# EAGLE board Light Sensor - Teensy-DESKTOP-VOK6T8G (EAGLE 8.6.0)
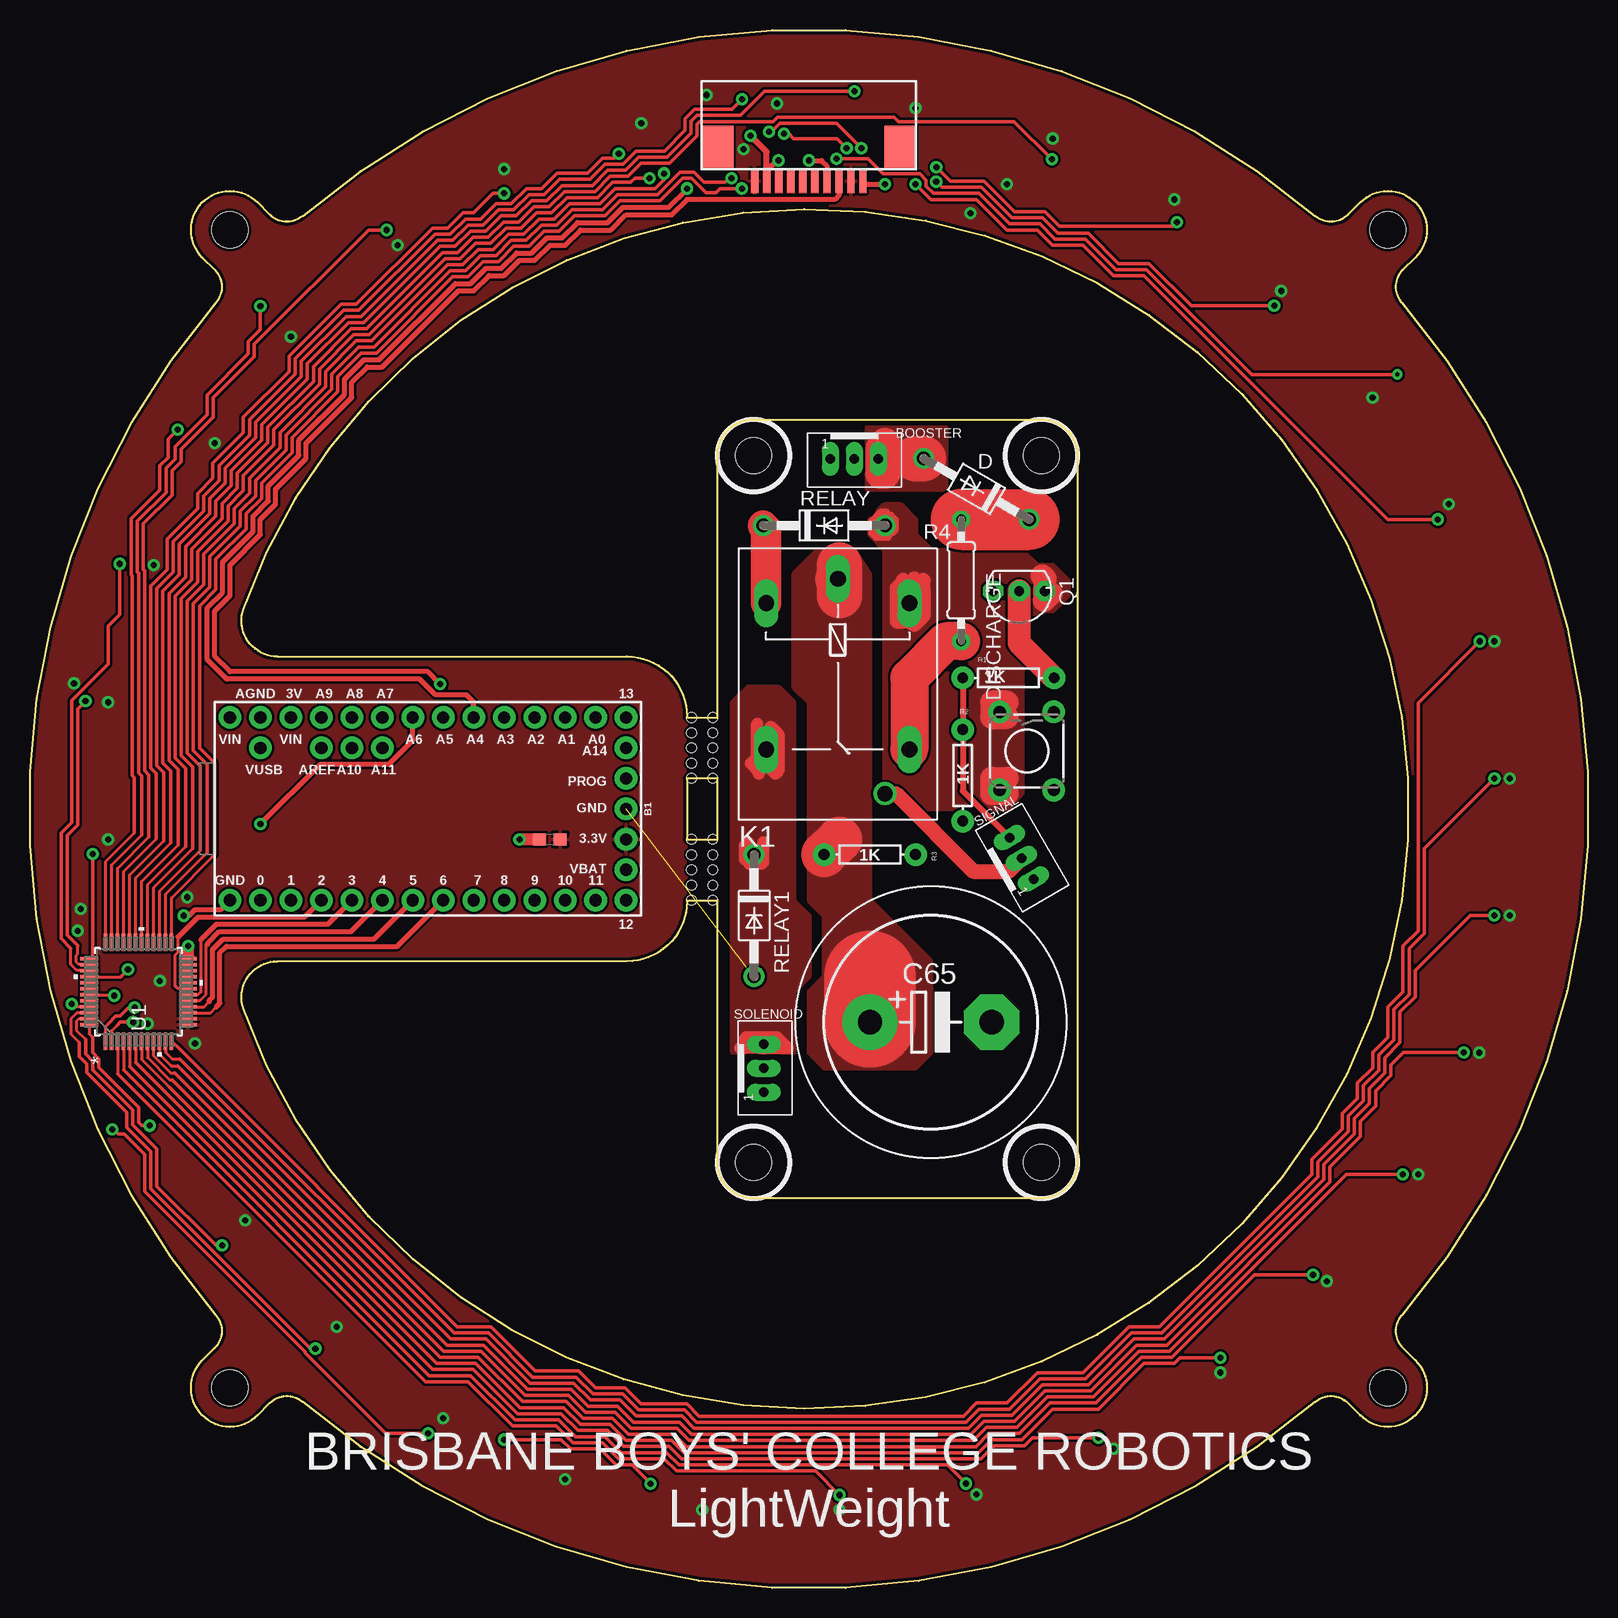
[diagram p0: board, top side]
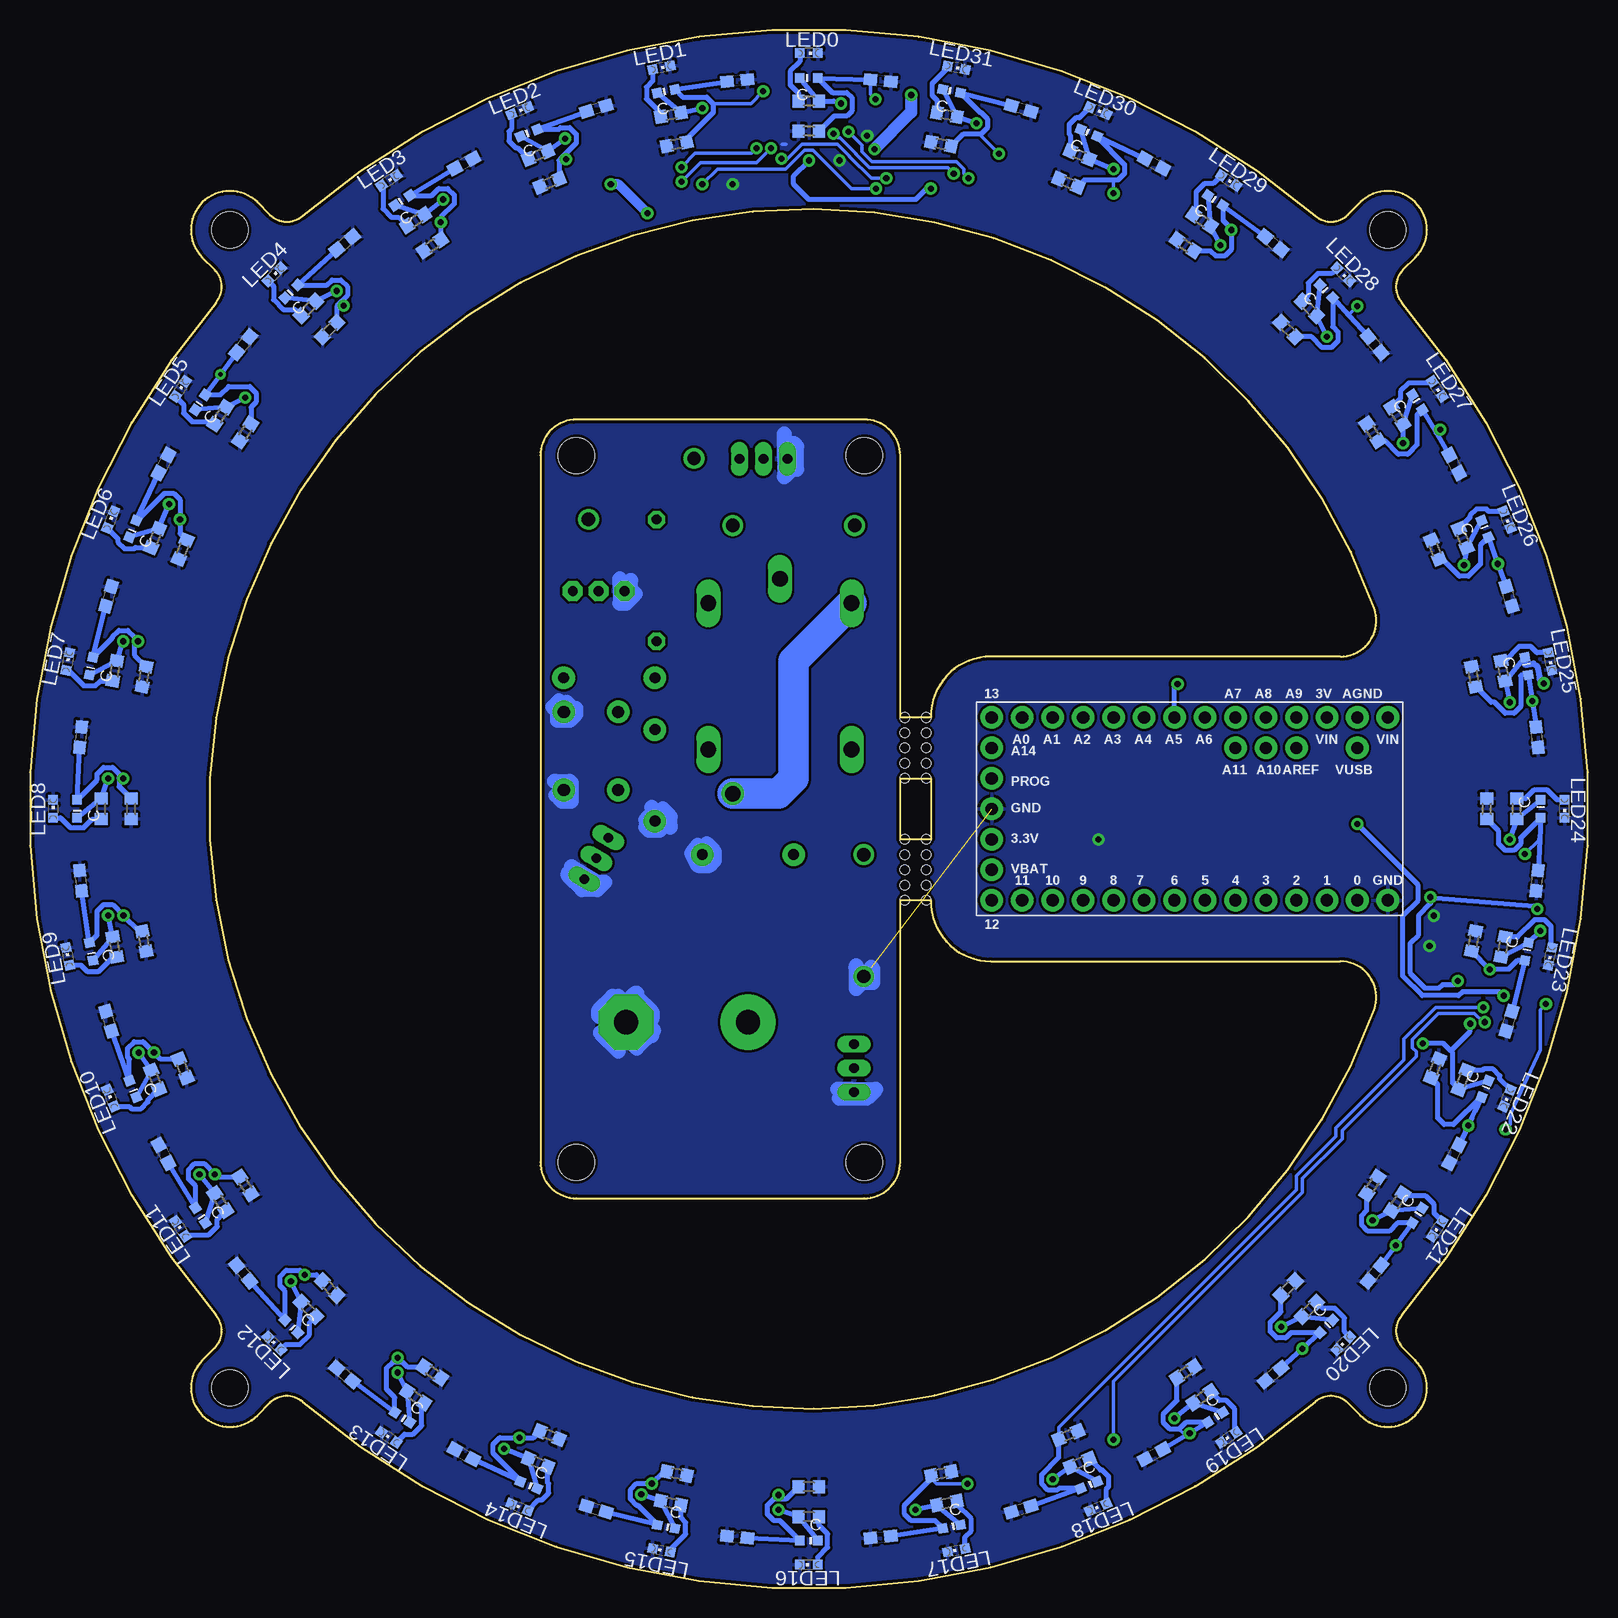
[diagram p1: board, bottom side, seen from below]

Size 129.86 x 129.86 mm. Coordinates in mm from the lower left corner, seen from the top.
Outline: 20.63,77.63 49.77,77.63 arc-90 54.77,72.63 54.77,72.55 57.31,72.55 57.31,94.39 arc-90 60.31,97.39 84.31,97.39 arc-90 87.31,94.39 87.31,35.47 arc-90 84.31,32.47 60.31,32.47 arc-90 57.31,35.47 57.31,57.31 54.77,57.31 54.77,57.23 arc-90 49.77,52.23 20.63,52.23 arc110 17.8,48.23 arc321 17.8,81.63 arc110 20.63,77.63
Outline: 57.31,67.47 54.77,67.47 54.77,62.39 57.31,62.39 57.31,67.47
Outline: 15.4,20 14.37,18.97 arc180 18.97,14.37 20,15.4 arc-86 22.71,15.51 arc81 107.15,15.51 arc-86 109.86,15.4 110.89,14.37 arc180 115.49,18.97 114.46,20 arc-86 114.35,22.71 arc81 114.35,107.15 arc-86 114.46,109.86 115.49,110.89 arc180 110.89,115.49 109.86,114.46 arc-86 107.15,114.35 arc81 22.71,114.35 arc-86 20,114.46 18.97,115.49 arc180 14.37,110.89 15.4,109.86 arc-86 15.51,107.15 arc81 15.51,22.71 arc-86 15.4,20
Copper layers (1*16): Top 0.035mm / dielectric 1.5mm / Bottom 0.035mm
Design rules "SparkFun": minimum track width 8mil, minimum drill 20mil, track to track 8mil, track to pad 8mil, pad to pad 8mil, via to via 8mil, smd to smd 8mil, copper to edge 10mil, drill to drill 8mil, minimum pad ring 12mil, minimum via ring 10mil, stop-mask expansion 4mil, vias tented up to drill 25mil, thermal gap 10mil
Holes 0.79 mm at 55.15,72.55 55.15,71.28 55.15,70.01 55.15,68.74 55.15,67.47 55.15,62.39 55.15,61.12 55.15,59.85 55.15,58.58 55.15,57.31 56.93,57.31 56.93,58.58 56.93,59.85 56.93,61.12 56.93,62.39 56.93,67.47 56.93,68.74 56.93,70.01 56.93,71.28 56.93,72.55
Holes 3 mm at 60.31,94.39 84.31,94.39 84.31,35.47 60.31,35.47 16.67,16.67 113.19,16.67 16.67,113.19 113.19,113.19

## Footprints (pad centres in the part's own frame; a part is rotated, then mirrored left to right if it is on the bottom)
TEENSY-3.1 = drill 1.016 pad 1.88: 0 7.62,-13.97; 1 7.62,-11.43; 2 7.62,-8.89; 3 7.62,-6.35; 3.3V 2.54,16.51; 3V -7.62,-11.43; 4 7.62,-3.81; 5 7.62,-1.27; 6 7.62,1.27; 7 7.62,3.81; 8 7.62,6.35; 9 7.62,8.89; 10 7.62,11.43; 11 7.62,13.97; 12 7.62,16.51; 13 -7.62,16.51; 14 -7.62,13.97; 15 -7.62,11.43; 16 -7.62,8.89; 17 -7.62,6.35; 18 -7.62,3.81; 19 -7.62,1.27; 20 -7.62,-1.27; 21 -7.62,-3.81; 22 -7.62,-6.35; 23 -7.62,-8.89; A10 -5.08,-6.35; A11 -5.08,-3.81; A14/DAC -5.08,16.51; AGND -7.62,-13.97; AREF -5.08,-8.89; GND 0,16.51; GND1 7.62,-16.51; PROG -2.54,16.51; VBAT 5.08,16.51; VIN -7.62,-16.51; VUSB -5.08,-13.97
JST_B3B-PH_HEADER = drill 0.8 long: P1 2.027,0.048; P2 0.028,0.048; P3 -1.972,0.048
C0603 = smd 1.1 x 1: 1 -0.85,0; 2 0.85,0
0603 = smd 1.1 x 1: 1 -0.85,0; 2 0.85,0
EB22,5D = drill 2.007 pad 4.597: + -5.08,0 | drill 2.007 pad 4.597 octagon: - 5.08,0
DO41-10 = drill 1.118: A 5.08,0; C -5.08,0
TACTILE-PTH = drill 1.016 pad 1.88: 1 -3.251,2.261; 2 3.251,2.261; 3 -3.251,-2.261; 4 3.251,-2.261
G5LE = drill 1.321 long: 1 -7.493,-5.969; 2 -7.493,5.969; O 4.699,5.969; P -9.525,0; S 4.699,-5.969
CHIPLED_0603 = smd 0.8 x 0.8: A 0,-0.75; C 0,0.75
SMD = smd 0.8 x 0.8: C -0.75,0; E 0.75,0
TO92-INLINE = drill 0.813 pad 1.676 octagon: 1 -2.159,0; 2 0,0; 3 2.159,0
AXIAL-0.3 = drill 0.9 pad 1.88: P$1 -3.81,0; P$2 3.81,0
0207/10 = drill 0.813 octagon: 1 -5.08,0; 2 5.08,0
R0603 = smd 1 x 1.1: 1 -0.85,0; 2 0.85,0
SU_48 = smd 1.473 x 0.279: 1 -4.115,2.75; 2 -4.115,2.25; 3 -4.115,1.75; 4 -4.115,1.25; 5 -4.115,0.75; 6 -4.115,0.25; 7 -4.115,-0.25; 8 -4.115,-0.75; 9 -4.115,-1.25; 10 -4.115,-1.75; 11 -4.115,-2.25; 12 -4.115,-2.75; 25 4.115,-2.75; 26 4.115,-2.25; 27 4.115,-1.75; 28 4.115,-1.25; 29 4.115,-0.75; 30 4.115,-0.25; 31 4.115,0.25; 32 4.115,0.75; 33 4.115,1.25; 34 4.115,1.75; 35 4.115,2.25; 36 4.115,2.75 | smd 0.279 x 1.473: 13 -2.75,-4.115; 14 -2.25,-4.115; 15 -1.75,-4.115; 16 -1.25,-4.115; 17 -0.75,-4.115; 18 -0.25,-4.115; 19 0.25,-4.115; 20 0.75,-4.115; 21 1.25,-4.115; 22 1.75,-4.115; 23 2.25,-4.115; 24 2.75,-4.115; 37 2.75,4.115; 38 2.25,4.115; 39 1.75,4.115; 40 1.25,4.115; 41 0.75,4.115; 42 0.25,4.115; 43 -0.25,4.115; 44 -0.75,4.115; 45 -1.25,4.115; 46 -1.75,4.115; 47 -2.25,4.115; 48 -2.75,4.115
FPC10 = smd 0.61 x 2.007: 1 -4.515,1.003; 2 -3.512,1.003; 3 -2.508,1.003; 4 -1.505,1.003; 5 -0.502,1.003; 6 0.502,1.003; 7 1.505,1.003; 8 2.508,1.003; 9 3.512,1.003; 10 4.515,1.003 | smd 2.667 x 3.607: N/C-1 -7.62,-1.803; N/C-2 7.62,-1.803

## Placement (x,y rotation side)
B1  TEENSY-3.1SILK  [TEENSY-3.1]  33.18,64.93 270 top
BOOSTER  JST-PH_3-PIN_HEADER  [JST_B3B-PH_HEADER]  68.74,94.14 180 top
C1  0.1uF  [C0603]  58.95,125.63 174.3 bottom
C2  0.1uF  [C0603]  70.91,125.63 185.6 bottom
C3  0.1uF  [C0603]  82.64,123.3 196.9 bottom
C4  0.1uF  [C0603]  93.68,118.73 208.1 bottom
C5  0.1uF  [C0603]  103.63,112.08 219.4 bottom
C6  0.1uF  [C0603]  112.08,103.63 230.6 bottom
C7  0.1uF  [C0603]  118.73,93.68 241.9 bottom
C8  0.1uF  [C0603]  123.3,82.64 253.1 bottom
C9  0.1uF  [C0603]  125.63,70.91 264.4 bottom
C10  0.1uF  [C0603]  125.63,58.95 275.6 bottom
C11  0.1uF  [C0603]  123.3,47.22 286.9 bottom
C12  0.1uF  [C0603]  118.73,36.17 298.1 bottom
C13  0.1uF  [C0603]  112.08,26.23 309.4 bottom
C14  0.1uF  [C0603]  103.63,17.77 320.6 bottom
C15  0.1uF  [C0603]  93.68,11.13 331.9 bottom
C16  0.1uF  [C0603]  82.64,6.55 343.1 bottom
C17  0.1uF  [C0603]  70.91,4.22 354.4 bottom
C18  0.1uF  [C0603]  58.95,4.22 5.6 bottom
C19  0.1uF  [C0603]  47.22,6.55 16.9 bottom
C20  0.1uF  [C0603]  36.17,11.13 28.1 bottom
C21  0.1uF  [C0603]  26.23,17.77 39.4 bottom
C22  0.1uF  [C0603]  17.77,26.23 50.6 bottom
C23  0.1uF  [C0603]  11.13,36.17 61.9 bottom
C24  0.1uF  [C0603]  6.55,47.22 73.1 bottom
C25  0.1uF  [C0603]  4.22,58.95 84.4 bottom
C26  0.1uF  [C0603]  4.22,70.91 95.6 bottom
C27  0.1uF  [C0603]  6.55,82.64 106.9 bottom
C28  0.1uF  [C0603]  11.13,93.68 118.1 bottom
C29  0.1uF  [C0603]  17.77,103.63 129.4 bottom
C30  0.1uF  [C0603]  26.23,112.08 140.6 bottom
C31  0.1uF  [C0603]  36.17,118.73 151.9 bottom
C32  0.1uF  [C0603]  47.22,123.3 163.1 bottom
C33  0.1uF  [0603]  43.34,62.39 0 top
C65  3300uF  [EB22,5D]  75.09,47.15 0 top
D  1N4004  [DO41-10]  78.9,91.6 150 top
DISCHARGE  [TACTILE-PTH]  83.09,69.75 270 top
K1  G5LE  [G5LE]  67.34,74.58 270 top
LED0  [CHIPLED_0603]  64.93,127.93 270 bottom
LED1  [CHIPLED_0603]  77.22,126.72 281.2 bottom
LED2  [CHIPLED_0603]  89.04,123.13 292.5 bottom
LED3  [CHIPLED_0603]  99.93,117.31 303.7 bottom
LED4  [CHIPLED_0603]  109.48,109.48 315 bottom
LED5  [CHIPLED_0603]  117.31,99.93 326.2 bottom
LED6  [CHIPLED_0603]  123.13,89.04 337.5 bottom
LED7  [CHIPLED_0603]  126.72,77.22 348.7 bottom
LED8  [CHIPLED_0603]  127.93,64.93 0 bottom
LED9  [CHIPLED_0603]  126.72,52.64 11.2 bottom
LED10  [CHIPLED_0603]  123.13,40.82 22.5 bottom
LED11  [CHIPLED_0603]  117.31,29.93 33.7 bottom
LED12  [CHIPLED_0603]  109.48,20.38 45 bottom
LED13  [CHIPLED_0603]  99.93,12.55 56.2 bottom
LED14  [CHIPLED_0603]  89.04,6.72 67.5 bottom
LED15  [CHIPLED_0603]  77.22,3.14 78.7 bottom
LED16  [CHIPLED_0603]  64.93,1.93 90 bottom
LED17  [CHIPLED_0603]  52.64,3.14 101.2 bottom
LED18  [CHIPLED_0603]  40.82,6.72 112.5 bottom
LED19  [CHIPLED_0603]  29.93,12.55 123.7 bottom
LED20  [CHIPLED_0603]  20.38,20.38 135 bottom
LED21  [CHIPLED_0603]  12.55,29.93 146.2 bottom
LED22  [CHIPLED_0603]  6.72,40.82 157.5 bottom
LED23  [CHIPLED_0603]  3.14,52.64 168.7 bottom
LED24  [CHIPLED_0603]  1.93,64.93 180 bottom
LED25  [CHIPLED_0603]  3.14,77.22 191.2 bottom
LED26  [CHIPLED_0603]  6.72,89.04 202.5 bottom
LED27  [CHIPLED_0603]  12.55,99.93 213.7 bottom
LED28  [CHIPLED_0603]  20.38,109.48 225 bottom
LED29  [CHIPLED_0603]  29.93,117.31 236.2 bottom
LED30  [CHIPLED_0603]  40.82,123.13 247.5 bottom
LED31  [CHIPLED_0603]  52.64,126.72 258.7 bottom
LS0  ALS  [SMD]  64.93,125.85 0 bottom
LS1  ALS  [SMD]  76.83,124.76 11.2 bottom
LS2  ALS  [SMD]  88.27,121.28 22.5 bottom
LS3  ALS  [SMD]  98.82,115.65 33.7 bottom
LS4  ALS  [SMD]  108.06,108.06 45 bottom
LS5  ALS  [SMD]  115.65,98.82 56.2 bottom
LS6  ALS  [SMD]  121.28,88.27 67.5 bottom
LS7  ALS  [SMD]  124.76,76.83 78.7 bottom
LS8  ALS  [SMD]  125.93,64.93 90 bottom
LS9  ALS  [SMD]  124.76,53.03 101.2 bottom
LS10  ALS  [SMD]  121.28,41.58 112.5 bottom
LS11  ALS  [SMD]  115.65,31.04 123.7 bottom
LS12  ALS  [SMD]  108.06,21.79 135 bottom
LS13  ALS  [SMD]  98.82,14.21 146.2 bottom
LS14  ALS  [SMD]  88.27,8.57 157.5 bottom
LS15  ALS  [SMD]  76.83,5.1 168.7 bottom
LS16  ALS  [SMD]  64.93,3.93 180 bottom
LS17  ALS  [SMD]  53.03,5.1 191.2 bottom
LS18  ALS  [SMD]  41.58,8.57 202.5 bottom
LS19  ALS  [SMD]  31.04,14.21 213.7 bottom
LS20  ALS  [SMD]  21.79,21.79 225 bottom
LS21  ALS  [SMD]  14.21,31.04 236.2 bottom
LS22  ALS  [SMD]  8.57,41.58 247.5 bottom
LS23  ALS  [SMD]  5.1,53.03 258.7 bottom
LS24  ALS  [SMD]  3.93,64.93 270 bottom
LS25  ALS  [SMD]  5.1,76.83 281.2 bottom
LS26  ALS  [SMD]  8.57,88.27 292.5 bottom
LS27  ALS  [SMD]  14.21,98.82 303.7 bottom
LS28  ALS  [SMD]  21.79,108.06 315 bottom
LS29  ALS  [SMD]  31.04,115.65 326.2 bottom
LS30  ALS  [SMD]  41.58,121.28 337.5 bottom
LS31  ALS  [SMD]  53.03,124.76 348.7 bottom
Q1  FQN1N50CI  [TO92-INLINE]  82.45,83.09 180 top
R1  1K  [AXIAL-0.3]  81.56,75.85 0 top
R2  1K  [AXIAL-0.3]  77.75,67.72 90 top
R3  1K  [AXIAL-0.3]  70.01,61.12 180 top
R4  50ohm  [0207/10]  77.63,83.98 90 top
RELAY  1N4004  [DO41-10]  66.2,88.55 0 top
RELAY1  1N4004  [DO41-10]  60.36,56.04 270 top
RL1  100  [R0603]  64.93,123.93 0 bottom
RL2  100  [R0603]  76.44,122.79 11.2 bottom
RL3  100  [R0603]  87.51,119.44 22.5 bottom
RL4  100  [R0603]  97.71,113.98 33.7 bottom
RL5  100  [R0603]  106.65,106.65 45 bottom
RL6  100  [R0603]  113.98,97.71 56.2 bottom
RL7  100  [R0603]  119.44,87.51 67.5 bottom
RL8  100  [R0603]  122.79,76.44 78.7 bottom
RL9  100  [R0603]  123.93,64.93 90 bottom
RL10  100  [R0603]  122.79,53.42 101.2 bottom
RL11  100  [R0603]  119.44,42.35 112.5 bottom
RL12  100  [R0603]  113.98,32.15 123.7 bottom
RL13  100  [R0603]  106.65,23.21 135 bottom
RL14  100  [R0603]  97.71,15.87 146.2 bottom
RL15  100  [R0603]  87.51,10.42 157.5 bottom
RL16  100  [R0603]  76.44,7.06 168.7 bottom
RL17  100  [R0603]  64.93,5.93 180 bottom
RL18  100  [R0603]  53.42,7.06 191.2 bottom
RL19  100  [R0603]  42.35,10.42 202.5 bottom
RL20  100  [R0603]  32.15,15.87 213.7 bottom
RL21  100  [R0603]  23.21,23.21 225 bottom
RL22  100  [R0603]  15.87,32.15 236.2 bottom
RL23  100  [R0603]  10.42,42.35 247.5 bottom
RL24  100  [R0603]  7.06,53.42 258.7 bottom
RL25  100  [R0603]  5.93,64.93 270 bottom
RL26  100  [R0603]  7.06,76.44 281.2 bottom
RL27  100  [R0603]  10.42,87.51 292.5 bottom
RL28  100  [R0603]  15.87,97.71 303.7 bottom
RL29  100  [R0603]  23.21,106.65 315 bottom
RL30  100  [R0603]  32.15,113.98 326.2 bottom
RL31  100  [R0603]  42.35,119.44 337.5 bottom
RL32  100  [R0603]  53.42,122.79 348.7 bottom
RS1  33K  [R0603]  64.93,121.43 0 bottom
RS2  33K  [R0603]  75.95,120.34 11.2 bottom
RS3  33K  [R0603]  86.55,117.13 22.5 bottom
RS4  33K  [R0603]  96.32,111.91 33.7 bottom
RS5  33K  [R0603]  104.88,104.88 45 bottom
RS6  33K  [R0603]  111.91,96.32 56.2 bottom
RS7  33K  [R0603]  117.13,86.55 67.5 bottom
RS8  33K  [R0603]  120.34,75.95 78.7 bottom
RS9  33K  [R0603]  121.43,64.93 90 bottom
RS10  33K  [R0603]  120.34,53.91 101.2 bottom
RS11  33K  [R0603]  117.13,43.31 112.5 bottom
RS12  33K  [R0603]  111.91,33.54 123.7 bottom
RS13  33K  [R0603]  104.88,24.98 135 bottom
RS14  33K  [R0603]  96.32,17.95 146.2 bottom
RS15  33K  [R0603]  86.55,12.73 157.5 bottom
RS16  33K  [R0603]  75.95,9.51 168.7 bottom
RS17  33K  [R0603]  64.93,8.43 180 bottom
RS18  33K  [R0603]  53.91,9.51 191.2 bottom
RS19  33K  [R0603]  43.31,12.73 202.5 bottom
RS20  33K  [R0603]  33.54,17.95 213.7 bottom
RS21  33K  [R0603]  24.98,24.98 225 bottom
RS22  33K  [R0603]  17.95,33.54 236.2 bottom
RS23  33K  [R0603]  12.73,43.31 247.5 bottom
RS24  33K  [R0603]  9.51,53.91 258.7 bottom
RS25  33K  [R0603]  8.43,64.93 270 bottom
RS26  33K  [R0603]  9.51,75.95 281.2 bottom
RS27  33K  [R0603]  12.73,86.55 292.5 bottom
RS28  33K  [R0603]  17.95,96.32 303.7 bottom
RS29  33K  [R0603]  24.98,104.88 315 bottom
RS30  33K  [R0603]  33.54,111.91 326.2 bottom
RS31  33K  [R0603]  43.31,117.13 337.5 bottom
RS32  33K  [R0603]  53.91,120.34 348.7 bottom
SIGNAL  JST-PH_3-PIN_HEADER  [JST_B3B-PH_HEADER]  82.6,60.8 300 top
SOLENOID  JST-PH_3-PIN_HEADER  [JST_B3B-PH_HEADER]  61.12,43.34 270 top
U1  ADG732BSUZ-REEL  [SU_48]  9.05,49.69 90 top
U$1  FPC10  [FPC10]  64.93,118.27 180 top

## Library data of the parts
B1 = SparkFun-Boards; SF_ID: DEV-12646
BOOSTER D DISCHARGE Q1 RELAY RELAY1 SIGNAL SOLENOID = Kicker
C1-C32 C65 LED0 LED1-LED31 RL1-RL32 RS1-RS32 = adafruit
C33 = SparkFun-Capacitors; PROD_ID: CAP-00810
K1 = Kicker; OC_FARNELL: unknown; OC_NEWARK: unknown
LS0 LS1-LS31 = phototransitor-ALS-PT19-315CL177TR8
R1-R3 = Kicker; PROD_ID: RES-12182
R4 = Kicker; SPICEMODEL: NONE; SPICEPREFIX: R
U1 = ADG732; MANUFACTURER_PART_NUMBER: ADG732BSUZREEL; VENDOR: Analog Devices Inc
U$1 = FFC

## Nets
3V: B1.3V
+3V3: B1.3.3V C33.2 LS0.C LS1.C LS2.C LS3.C LS4.C LS5.C LS6.C LS7.C LS8.C LS9.C LS10.C LS11.C LS12.C LS13.C LS14.C LS15.C LS16.C LS17.C LS18.C LS19.C LS20.C LS21.C LS22.C LS23.C LS24.C LS25.C LS26.C LS27.C LS28.C LS29.C LS30.C LS31.C RL1.2 RL2.2 RL3.2 RL4.2 RL5.2 RL6.2 RL7.2 RL8.2 RL9.2 RL10.2 RL11.2 RL12.2 RL13.2 RL14.2 RL15.2 RL16.2 RL17.2 RL18.2 RL19.2 RL20.2 RL21.2 RL22.2 RL23.2 RL24.2 RL25.2 RL26.2 RL27.2 RL28.2 RL29.2 RL30.2 RL31.2 RL32.2 U1.13 U1.14 U$1.2 U$1.10
+12V: K1.1 RELAY.C SIGNAL.P2
AGND: B1.AGND
CHARGE: C65.+ K1.P R3.P$2
CONTROL1: B1.2 U1.19
CONTROL2: B1.3 U1.18
CONTROL3: B1.4 U1.17
CONTROL4: B1.5 U1.16
CONTROL5: B1.6 U1.15
GND: B1.GND B1.GND1 BOOSTER.P1 C1.1 C2.1 C3.1 C4.1 C5.1 C6.1 C7.1 C8.1 C9.1 C10.1 C11.1 C12.1 C13.1 C14.1 C15.1 C16.1 C17.1 C18.1 C19.1 C20.1 C21.1 C22.1 C23.1 C24.1 C25.1 C26.1 C27.1 C28.1 C29.1 C30.1 C31.1 C32.1 C33.1 C65.- DISCHARGE.1 DISCHARGE.2 LED0.C LED1.C LED2.C LED3.C LED4.C LED5.C LED6.C LED7.C LED8.C LED9.C LED10.C LED11.C LED12.C LED13.C LED14.C LED15.C LED16.C LED17.C LED18.C LED19.C LED20.C LED21.C LED22.C LED23.C LED24.C LED25.C LED26.C LED27.C LED28.C LED29.C LED30.C LED31.C Q1.3 R2.P$1 R3.P$1 RELAY1.A RS1.1 RS2.1 RS3.1 RS4.1 RS5.1 RS6.1 RS7.1 RS8.1 RS9.1 RS10.1 RS11.1 RS12.1 RS13.1 RS14.1 RS15.1 RS16.1 RS17.1 RS18.1 RS19.1 RS20.1 RS21.1 RS22.1 RS23.1 RS24.1 RS25.1 RS26.1 RS27.1 RS28.1 RS29.1 RS30.1 RS31.1 RS32.1 SIGNAL.P1 SOLENOID.P1 U1.20 U1.21 U1.22 U1.23 U1.24 U$1.1 U$1.9
LS0: C1.2 LS0.E RS1.2 U1.31
LS1: C2.2 LS1.E RS2.2 U1.30
LS2: C3.2 LS2.E RS3.2 U1.29
LS3: C4.2 LS3.E RS4.2 U1.28
LS4: C5.2 LS4.E RS5.2 U1.27
LS5: C6.2 LS5.E RS6.2 U1.26
LS6: C7.2 LS6.E RS7.2 U1.25
LS7: C8.2 LS7.E RS8.2 U1.12
LS8: C9.2 LS8.E RS9.2 U1.11
LS9: C10.2 LS9.E RS10.2 U1.10
LS10: C11.2 LS10.E RS11.2 U1.9
LS11: C12.2 LS11.E RS12.2 U1.8
LS12: C13.2 LS12.E RS13.2 U1.7
LS13: C14.2 LS13.E RS14.2 U1.6
LS14: C15.2 LS14.E RS15.2 U1.5
LS15: C16.2 LS15.E RS16.2 U1.4
LS16: C17.2 LS16.E RS17.2 U1.3
LS17: C18.2 LS17.E RS18.2 U1.2
LS18: C19.2 LS18.E RS19.2 U1.1
LS19: C20.2 LS19.E RS20.2 U1.45
LS20: C21.2 LS20.E RS21.2 U1.46
LS21: C22.2 LS21.E RS22.2 U1.47
LS22: C23.2 LS22.E RS23.2 U1.48
LS23: C24.2 LS23.E RS24.2 U1.40
LS24: C25.2 LS24.E RS25.2 U1.37
LS25: C26.2 LS25.E RS26.2 U1.38
LS26: C27.2 LS26.E RS27.2 U1.39
LS27: C28.2 LS27.E RS28.2 U1.36
LS28: C29.2 LS28.E RS29.2 U1.35
LS29: C30.2 LS29.E RS30.2 U1.34
LS30: C31.2 LS30.E RS31.2 U1.33
LS31: C32.2 LS31.E RS32.2 U1.32
N$1: LED0.A RL1.1
N$2: LED1.A RL2.1
N$3: LED2.A RL3.1
N$4: LED3.A RL4.1
N$5: LED4.A RL5.1
N$6: LED5.A RL6.1
N$7: LED6.A RL7.1
N$8: LED7.A RL8.1
N$9: LED8.A RL9.1
N$10: LED9.A RL10.1
N$11: LED10.A RL11.1
N$12: LED11.A RL12.1
N$13: LED12.A RL13.1
N$14: LED13.A RL14.1
N$15: LED14.A RL15.1
N$16: LED15.A RL16.1
N$17: LED16.A RL17.1
N$18: LED17.A RL18.1
N$19: LED18.A RL19.1
N$20: LED19.A RL20.1
N$21: LED20.A RL21.1
N$22: LED21.A RL22.1
N$23: LED22.A RL23.1
N$24: LED23.A RL24.1
N$25: LED24.A RL25.1
N$26: LED25.A RL26.1
N$27: LED26.A RL27.1
N$28: LED27.A RL28.1
N$29: LED28.A RL29.1
N$30: LED29.A RL30.1
N$31: LED30.A RL31.1
N$32: LED31.A RL32.1
N$33: Q1.2 R1.P$2
N$34: BOOSTER.P3 D.A
N$35: D.C R4.2
NC0: U$1.5
NC1: U$1.6
NC2: U$1.7
NC3: U$1.8
OUT: K1.S RELAY1.C SOLENOID.P3
OUTPUT: B1.20 U1.43
RELAY: DISCHARGE.3 DISCHARGE.4 K1.2 Q1.1 RELAY.A
SCL: B1.19 U$1.3
SDA: B1.18 U$1.4
SIGNAL: R1.P$1 R2.P$2 SIGNAL.P3
VBAT: B1.VBAT
VCC: K1.O R4.1
VIN: B1.VIN
VUSB: B1.VUSB

## Tracks (layer width: path | path; a pad name or v marks a point on that pad's centre or on a via)
+3V3  (via drill 0.51)
  Bottom 0.406: v50.96,122.08 RL32.2 LS31.C | v62.26,123.73 62.84,123.93 RL1.2 LS0.C | v73.82,123.35 RL2.2 LS1.C | v85.25,120.81 RL3.2 LS2.C | v95.41,115.73 RL4.2 LS3.C | v104.3,108.11 RL5.2 LS4.C | v111.92,99.22 RL6.2 LS5.C | v118.27,90.33 RL7.2 LS6.C | v122.08,78.9 RL8.2 LS7.C | v123.35,67.47 RL9.2 LS8.C | v123.35,56.04 RL10.2 LS9.C | v120.81,44.61 RL11.2 LS10.C | v115.73,34.45 RL12.2 LS11.C | v108.11,25.56 RL13.2 LS12.C | v99.22,17.94 RL14.2 LS13.C | v90.33,11.59 RL15.2 LS14.C | v78.9,7.78 RL16.2 LS15.C | v67.47,6.51 RL17.2 LS16.C | v56.04,6.51 RL18.2 LS17.C | v44.61,9.05 RL19.2 LS18.C | v34.45,14.13 RL20.2 LS19.C | v25.56,21.75 RL21.2 LS20.C | v17.94,30.64 RL22.2 LS21.C | v3.97,54.77 4.95,53.78 LS23.C RL24.2 | v6.51,62.39 RL25.2 LS24.C | v6.51,73.82 RL26.2 LS25.C | v10.32,85.25 RL27.2 LS26.C | v15.4,95.41 RL28.2 LS27.C | v21.75,104.3 RL29.2 LS28.C | v30.64,111.92 RL30.2 LS29.C | v39.53,118.27 RL31.2 LS30.C | LS22.C RL23.2 11.26,42.08 11.26,44.61 11.43,44.77 | 11.43,44.77 12.03,45.37 v13.75,45.37 | 11.43,44.77 9.81,46.39 v9.81,47.02 | v10.83,50.58 11.13,50.27 12.09,50.27 12.4,49.97 13.54,49.97 14.79,51.21 14.79,53.75 14.1,54.44 14.1,56.04 13.11,57.03 v13.11,57.56 4.48,56.85 v4.22,56.6
  Bottom 0.508: LS25.C 5.25,76.97 5.19,76.92 4.54,77.05 4.23,76.84 4.01,75.73 v3.67,75.39
  Bottom 0.813: v78.39,114.58 80.8,117 v81.44,117
  Bottom 1.016: v59.47,119.92 56.4,122.98 v56.4,124.44
  pour Top: 64.93,130.97 -1.11,130.97 -1.11,57.31 -1.11,-1.11 66.2,-1.11 130.97,-1.11 130.97,66.2 130.97,130.97
+12V  (via drill 1.27)
  Top 1.27: v71.28,66.2 72.17,66.2 78.64,59.72 81.57,59.72 SIGNAL.P2
  Top 2.54: RELAY.C 61.37,88.3 K1.1
  Bottom 2.54: K1.1 66.2,77.25 66.2,67.47 67.47,66.2 v71.28,66.2
CHARGE
  Top 3.81: R3.P$2 67.47,62.39 | K1.P 67.47,83.98 | 67.47,83.98 67.47,82.71 | 67.47,83.98 67.47,85.25
  Top 7.62: 70.01,50.96 C65.+
  pour Top: 70.01,84.49 68.74,86.52 65.69,86.52 63.66,84.49 63.66,75.09 64.93,73.82 64.93,57.31 66.2,56.04 66.2,50.96 64.93,49.69 64.93,44.61 66.2,43.34 73.82,43.34 75.09,44.61 75.09,52.23 70.01,57.31
CONTROL1
  Top 0.254: U1.19 13.13,49.97 12.29,49.97 12.1,50.16 12.1,52.74 12.35,52.99 12.35,54.26
  Top 0.406: 12.35,54.26 14,55.91 22.89,55.91 B1.2
CONTROL2
  Top 0.254: U1.18 13.19,49.47 14.04,49.47 14.23,49.66 14.23,53.98
  Top 0.406: B1.3 24.82,55.3 15.52,55.3 15.19,54.97 14.88,54.65 14.23,54.01 14.23,53.98
CONTROL3
  Top 0.254: U1.17 13.19,48.97 14.18,48.97 14.69,49.47 14.69,53.55 14.76,53.62
  Top 0.406: 14.76,53.62 14.84,53.7 14.84,53.75 15.78,54.69 26.75,54.69 B1.4
CONTROL4
  Top 0.254: U1.16 14.53,48.44 14.95,48.86
  Top 0.406: 14.95,48.86 14.95,48.98 15.22,49.25 15.22,53.19 16.11,54.08 28.68,54.08 B1.5
CONTROL5
  Top 0.254: U1.15 15.04,47.94 15.52,48.42
  Top 0.406: 15.52,48.42 15.83,48.72 15.83,52.94 16.36,53.47 30.61,53.47 B1.6
GND  (via drill 0.51)  (1 unrouted)
  Top 0.254: U1.24 U1.23 | U1.20 U1.21
  Top 0.406: v62.39,118.98 62.08,118.67 61.95,118.67 61.42,118.14 U$1.9 | U$1.1 69.71,117 v71.28,117 | B1.GND1 15.88,56.52 13.75,56.52 13.25,56.03 v12.82,56.03
  Top 0.508: U$1.9 61.42,119.69 v60.07,121.04
  Top 0.813: U1.23 U1.22 U1.21
  Top 1.016: U1.24 13.16,52.62 13.19,52.64 v13.19,53.5 | C33.1 v40.8,62.39
  Bottom 0.305: 66.85,120.35 67.19,120.35
  Bottom 1.27: BOOSTER.P1 66.96,94.34 | 66.96,94.34 66.96,96.17 | 66.96,94.34 66.96,92.61 66.32,93.25 65.94,93.25 65.94,95.15 66.2,95.41 | Q1.3 80.68,83.47 | 80.68,83.47 80.68,84.1 | 80.68,83.47 80.68,82.07 80.17,82.07 79.41,82.83 79.79,83.22 79.79,83.98 | DISCHARGE.1 85.35,73.59 85.12,73.82 84.61,73.31 84.36,73.31 84.36,72.8 84.87,72.29 85.88,72.29 85.88,73.06 86.26,73.44 85.76,73.94 | DISCHARGE.2 86.06,67.21 | 86.06,67.21 86.14,67.21 | 86.06,67.21 84.87,67.21 84.74,67.09 84.74,65.56 85.5,65.56 86.01,66.07 | SIGNAL.P1 84.69,60.1 | 84.69,60.1 84.74,60.1 83.47,58.83 82.58,58.83 | 82.58,58.83 81.95,58.83 82.58,58.2 83.85,58.2 84.99,59.34 84.99,59.59 | 84.69,60.1 82.58,58.83 | R3.P$1 74.2,61.88 74.71,61.24 74.2,60.23 73.18,60.23 72.8,60.61 72.8,61.37 73.44,62.01 | R2.P$1 78.01,64.17 78.01,64.55 | 78.01,65.05 78.01,64.55 | 78.01,64.55 78.52,64.04 78.52,63.4 78.26,63.15 77.37,63.15 77.25,63.28 77.25,64.29 76.48,63.53 | 76.48,63.53 76.48,63.4 | 76.48,63.53 76.48,64.29 77.12,64.93 | RELAY1.A 60.99,51.59 | 60.99,51.59 60.99,51.85 | 60.99,51.59 60.99,49.94 60.48,50.45 59.59,50.45 59.59,51.59 59.72,51.72 | C65.- 81.06,48.04 82.07,48.04 82.45,47.66 82.45,48.16 81.31,49.31 80.8,49.31 80.8,48.42 80.68,48.29 79.41,49.56 79.28,49.56 79.28,49.31 78.01,48.04 78.01,47.4 78.9,47.4 79.41,47.91 | 79.41,47.91 79.41,48.29 | 79.41,47.91 79.41,47.4 78.01,46 78.01,46.39 77.88,46.51 77.88,46.39 79.28,44.99 79.53,45.24 79.53,46.26 82.33,46.26 80.8,44.73 80.8,45.5 80.68,45.62 | SOLENOID.P1 61.41,41.56 | 61.41,41.56 62.51,41.56 | 61.41,41.56 59.34,41.56 60.1,40.8 62.39,40.8
  pour Bottom: 64.93,130.97 -1.11,130.97 -1.11,63.66 -1.11,-1.11 67.47,-1.11 130.97,-1.11 130.97,67.47 130.97,130.97
  pour Bottom: 56.04,100.49 56.04,29.37 86.52,29.37 87.79,29.37 87.79,96.68 87.79,100.49
LS0  (via drill 0.51)
  Top 0.254: U1.31 8.8,59.16 11.74,62.1
  Top 0.305: 11.74,62.1 11.74,68.08 11.08,68.74 11.08,83.08 12.45,84.45 12.45,86.99 14.99,89.53 14.99,90.8 16.26,92.07 16.26,93.34 18.8,95.88 18.8,97.15 22.61,100.96 22.61,102.23 26.35,105.97 27.62,105.97 33.97,112.32 35.24,112.32 36.51,113.59 37.78,113.59 39.05,114.86 40.32,114.86 41.59,116.13 42.86,116.13 44.13,117.4 46.67,117.4 47.94,118.67 49.44,118.67 50.54,119.77 52.89,119.77 54.6,121.48 54.6,122.44 55.41,123.25 58.52,123.25 v59.36,124.09
  Bottom 0.305: v59.36,124.09 59.79,124.52 C1.2
  Bottom 0.406: RS1.2 62.82,122.69 61.75,122.69 61.35,123.1 61.35,124.23 61.75,124.64 62.97,124.64 LS0.E C1.2
LS1  (via drill 0.51)
  Top 0.254: U1.30 9.3,58.89 12.35,61.94
  Top 0.305: 12.35,61.94 12.35,68.19 11.59,68.96 11.59,82.87 12.96,84.24 12.96,86.78 15.5,89.32 15.5,90.59 16.77,91.86 16.77,93.13 19.31,95.67 19.31,96.94 23.12,100.75 23.12,102.02 26.56,105.47 27.83,105.47 34.18,111.82 35.45,111.82 36.72,113.09 37.99,113.09 39.26,114.36 40.53,114.36 41.8,115.63 43.07,115.63 44.34,116.9 46.88,116.9 48.15,118.17 49.65,118.17 50.75,119.26 53.1,119.26 55.11,121.27 55.11,122.23 55.62,122.74 59.24,122.74 61.24,124.74 v68.74,124.74
  Bottom 0.305: v68.74,124.74 69.76,123.73 72.9,123.73
  Bottom 0.406: RS2.2 75.12,120.76 72.9,122.97 72.9,123.73 73.44,124.26 75.45,124.26 LS1.E C2.2
LS2  (via drill 0.51)
  Top 0.254: U1.29 9.8,58.61 12.96,61.77
  Top 0.305: 12.96,61.77 12.96,68.3 12.1,69.17 12.1,82.66 13.47,84.03 13.47,86.57 16.01,89.11 16.01,90.38 17.28,91.65 17.28,92.92 19.82,95.46 19.82,96.73 23.63,100.54 23.63,101.81 26.77,104.96 28.04,104.96 34.39,111.31 35.66,111.31 36.93,112.58 38.2,112.58 39.47,113.85 40.74,113.85 42.01,115.12 43.28,115.12 44.55,116.39 47.09,116.39 48.36,117.66 49.86,117.66 50.96,118.76 53.31,118.76 55.62,121.06 55.62,122.02 55.83,122.23 61.94,122.23 62.3,122.59 72.04,122.59 72.4,122.23 82.03,122.23 v85.18,119.08
  Bottom 0.305: v85.18,119.08 85.68,119.08
  Bottom 0.406: C3.2 LS2.E 85.78,121.57 85.63,121.72 84.87,121.72 84.33,121.19 84.33,120.43 85.68,119.08 | RS3.2 85.76,119 85.26,119 v85.18,119.08
LS3  (via drill 0.51)
  Top 0.254: U1.28 10.33,53.83 10.33,58.37 13.57,61.61
  Top 0.305: 13.57,61.61 13.57,68.41 12.6,69.38 12.6,82.45 13.98,83.82 13.98,86.36 16.52,88.9 16.52,90.17 17.79,91.44 17.79,92.71 20.33,95.25 20.33,96.52 24.14,100.33 24.14,101.6 26.98,104.45 28.25,104.45 34.6,110.8 35.87,110.8 37.14,112.07 38.41,112.07 39.68,113.34 40.95,113.34 42.22,114.61 43.49,114.61 44.76,115.88 47.3,115.88 48.57,117.15 50.07,117.15 50.42,117.51 v51.64,117.51 | v75.55,118.43 76.72,117.25 79.53,117.25 82.07,114.71 84.61,114.71 85.82,113.5 95.29,113.5 v95.61,113.82 | v61.61,121.37 61.8,121.37 62.51,122.08 67.22,122.08 v69.3,120
  Bottom 0.305: v51.64,117.51 51.99,117.86 51.99,118.25 52.62,118.88 59.66,118.88 60.51,119.73 60.51,120.26 v61.61,121.37 | v75.55,118.43 74.41,119.57 69.73,119.57 v69.3,120
  Bottom 0.406: C4.2 LS3.E 96.36,116.06 95.79,116.64 95.03,116.64 94.49,116.11 94.49,115.35 95.61,114.23 v95.61,113.82 RS4.2
LS4  (via drill 0.51)
  Top 0.254: U1.27 10.8,58.06 14.18,61.45
  Top 0.305: 14.18,61.45 14.18,68.52 13.11,69.59 13.11,82.24 14.48,83.61 14.48,86.15 17.02,88.69 17.02,89.96 18.29,91.23 18.29,92.5 20.83,95.04 20.83,96.31 24.64,100.12 24.64,101.39 27.19,103.94 28.46,103.94 34.81,110.29 36.08,110.29 37.35,111.56 38.62,111.56 39.89,112.83 41.16,112.83 42.43,114.1 43.7,114.1 44.97,115.37 47.51,115.37 48.78,116.64 52.11,116.64 52.85,117.39 v52.85,117.89 v52.86,117.89 | v75.54,117.21 76.01,116.74 79.32,116.74 81.86,114.2 84.4,114.2 85.67,112.93 88.21,112.93 90.75,110.39 93.29,110.39 96.79,106.89 v103.71,106.89 | v62.87,121.21 63.25,121.21 63.66,120.81 67.27,120.81 v68.08,119.99
  Bottom 0.305: v52.86,117.89 53.33,118.37 59.87,118.37 61.02,119.52 61.02,119.55 62.33,120.86 62.51,120.86 v62.87,121.21 | v75.54,117.21 73.98,118.78 69.3,118.78 v68.08,119.99 | v103.71,106.89 103.77,106.83 104.28,106.83
  Bottom 0.406: C5.2 LS4.E 105.11,108.59 104.68,109.02 103.92,109.02 103.38,108.49 103.38,107.73 104.28,106.83 RS5.2
LS5  (via drill 0.35, 0.51)
  Top 0.254: U1.26 11.33,53.83 11.33,57.82 14.79,61.28
  Top 0.305: 14.79,61.28 14.79,68.63 13.62,69.8 13.62,82.03 14.99,83.4 14.99,85.94 17.53,88.48 17.53,89.75 18.8,91.02 18.8,92.29 21.34,94.83 21.34,96.1 25.15,99.91 25.15,101.18 27.4,103.43 28.67,103.43 35.02,109.78 36.29,109.78 37.56,111.05 38.83,111.05 40.1,112.32 41.37,112.32 42.64,113.59 43.91,113.59 45.18,114.86 47.72,114.86 48.99,116.13 52.32,116.13 54.2,118.01 55.34,118.01 56.2,117.15 57.94,117.15 58.3,117.51 v58.48,117.51 | v67.22,119.13 69.85,119.13 71.12,117.86 74.18,117.86 74.68,117.36 74.68,116.85 75.3,116.24 79.11,116.24 81.65,113.7 84.19,113.7 85.46,112.43 88,112.43 90.54,109.89 93.08,109.89 101.84,101.12 113.19,101.12 113.82,101.12 113.95,101.12 v113.97,101.14
  Bottom 0.305: v58.48,117.51 59.72,117.51 61.52,119.31 61.52,119.34 62.54,120.35 65.5,120.35 66.76,119.08 66.81,119.13 v67.22,119.13
  Bottom 0.406: C6.2 v113.97,101.14 LS5.E 113.99,99.44 113.3,100.13 111.54,100.13 111,99.6 111,98.84 111.43,98.41 RS6.2
LS6  (via drill 0.51)
  Top 0.254: U1.25 11.8,57.52 15.4,61.12
  Top 0.305: 15.4,61.12 15.4,68.74 14.13,70.01 14.13,81.82 15.5,83.19 15.5,85.73 18.04,88.27 18.04,89.54 19.31,90.81 19.31,92.08 21.85,94.62 21.85,95.89 25.66,99.7 25.66,100.97 27.61,102.93 28.88,102.93 35.23,109.28 36.5,109.28 37.77,110.55 39.04,110.55 40.31,111.82 41.58,111.82 42.85,113.09 44.12,113.09 45.39,114.36 47.93,114.36 49.2,115.63 52.53,115.63 54.41,117.51 55.13,117.51 56.34,116.29 57.18,116.29 57.54,116.64 v59.34,116.64 | v73.82,117 75.09,115.73 78.9,115.73 81.44,113.19 83.98,113.19 85.25,111.92 87.79,111.92 90.33,109.38 92.87,109.38 113.19,89.06 v117.35,89.06
  Bottom 0.305: v59.34,116.64 61.37,116.64 64.57,119.84 65.29,119.84 66.86,118.27 72.55,118.27 v73.82,117
  Bottom 0.406: C7.2 LS6.E 120.92,88.96 118.65,91.24 117.89,91.24 117.35,90.71 v117.35,89.06 117.35,87.89 RS7.2
LS7  (via drill 0.51)
  Top 0.254: U1.12 12.25,45.12
  Top 0.305: 12.25,45.12 35.62,21.75 38.43,21.75 42.1,18.07 45.75,18.07 47.15,16.67 49.6,16.67 50.94,15.33 54.76,15.33 55.78,14.31 77.81,14.31 78.9,15.4 81.44,15.4 83.98,17.94 87.79,17.94 91.6,21.75 94.14,21.75 106.84,34.45 106.84,35.72 109.38,38.26 109.38,39.53 110.65,40.8 110.65,42.07 111.92,43.34 111.92,44.61 113.19,45.88 113.19,48.42 114.46,49.69 114.46,53.5 115.73,54.77 115.73,73.77 v120.86,78.9
  Bottom 0.305: v120.86,78.9 121.16,78.9
  Bottom 0.406: C8.2 LS7.E 122.99,79.18 122.99,79.28 122.46,79.81 121.7,79.81 121.16,79.28 121.16,78.9 121.16,77.77 RS8.2
LS8  (via drill 0.51)
  Top 0.254: U1.11 11.3,44.64 11.84,44.1 12.48,44.1
  Top 0.305: 12.48,44.1 35.34,21.24 38.21,21.24 41.89,17.56 45.54,17.56 46.94,16.16 49.39,16.16 50.73,14.82 54.55,14.82 55.57,13.8 78.02,13.8 79.11,14.89 81.65,14.89 84.19,17.43 88,17.43 91.81,21.24 94.35,21.24 107.35,34.24 107.35,35.51 109.89,38.05 109.89,39.32 111.16,40.59 111.16,41.86 112.43,43.13 112.43,44.4 113.7,45.67 113.7,48.21 114.97,49.48 114.97,53.29 116.24,54.56 116.24,61.63 v122.08,67.47
  Bottom 0.305: v122.08,67.47 122.43,67.47
  Bottom 0.406: C9.2 LS8.E 124.26,67.34 124.26,67.85 123.73,68.38 122.97,68.38 122.43,67.85 122.43,67.47 122.43,66.78 RS9.2
LS9  (via drill 0.51)
  Top 0.254: U1.10 10.83,45.54 10.83,44.47 11.78,43.52 12.3,43.52
  Top 0.305: v122.07,56.05 120.06,56.05 115.47,51.47 115.47,49.27 114.2,48 114.2,45.46 112.93,44.19 112.93,42.92 111.66,41.65 111.66,40.38 110.39,39.11 110.39,37.84 107.85,35.3 107.85,34.03 94.56,20.73 92.02,20.73 88.21,16.92 84.4,16.92 81.86,14.38 79.32,14.38 78.23,13.29 55.36,13.29 54.34,14.31 50.52,14.31 49.18,15.65 46.73,15.65 45.33,17.05 41.68,17.05 38,20.73 35.08,20.73 12.3,43.52
  Bottom 0.406: C10.2 LS9.E 124.26,54.4 124.26,56.42 123.73,56.95 122.97,56.95 v122.07,56.05 120.76,54.74 RS10.2
LS10  (via drill 0.51)
  Top 0.254: U1.9 10.33,45.54 10.33,44.32 11.72,42.93 12.07,42.93
  Top 0.305: v119.53,44.62 114.47,44.62 113.44,43.59 113.44,42.71 112.17,41.44 112.17,40.17 110.9,38.9 110.9,37.63 108.36,35.09 108.36,33.82 94.77,20.22 92.23,20.22 88.42,16.41 84.61,16.41 82.07,13.87 79.53,13.87 78.44,12.78 55.15,12.78 54.13,13.81 50.31,13.81 48.97,15.14 46.52,15.14 45.11,16.54 41.47,16.54 37.79,20.22 34.78,20.22 12.07,42.93
  Bottom 0.406: C11.2 LS10.E 121.57,44.08 121.72,44.23 121.72,44.99 121.19,45.52 120.43,45.52 v119.53,44.62 119,44.09 RS11.2
LS11  (via drill 0.51)
  Top 0.254: 11.85,42.35 11.65,42.35 9.8,44.2 U1.8
  Top 0.305: 11.85,42.35 34.48,19.72 37.58,19.72 41.26,16.04 44.9,16.04 46.31,14.64 48.76,14.64 50.1,13.3 53.92,13.3 54.94,12.27 78.65,12.27 79.74,13.37 82.28,13.37 84.82,15.91 88.63,15.91 92.44,19.72 94.98,19.72 109.72,34.46 v114.45,34.46
  Bottom 0.406: C12.2 LS11.E 116.06,33.49 116.64,34.07 116.64,34.83 116.11,35.36 115.35,35.36 v114.45,34.46 114.23,34.24 RS12.2
LS12  (via drill 0.51)
  Top 0.254: 11.62,41.76 11.59,41.76 9.3,44.06 U1.7
  Top 0.305: 11.62,41.76 34.18,19.21 37.37,19.21 41.05,15.53 44.69,15.53 46.1,14.13 48.55,14.13 49.89,12.79 53.71,12.79 54.73,11.77 78.86,11.77 79.95,12.86 82.49,12.86 85.03,15.4 88.84,15.4 92.65,19.21 95.19,19.21 102.07,26.09 v106.96,26.09
  Bottom 0.406: C13.2 LS12.E 108.59,24.75 109.02,25.18 109.02,25.94 108.49,26.47 107.35,26.47 v106.96,26.09 105.99,26.09 RS13.2
LS13  (via drill 0.51)
  Top 0.254: U1.6 8.8,43.78
  Top 0.305: 8.8,43.78 33.88,18.7 37.16,18.7 40.84,15.02 43.34,15.02 44.49,15.02 45.88,13.62 48.34,13.62 49.68,12.28 53.5,12.28 54.52,11.26 79.07,11.26 80.16,12.35 82.7,12.35 85.24,14.89 89.05,14.89 92.86,18.7 95.4,18.7 95.86,19.16 v99.22,19.16
  Bottom 0.305: v99.22,19.16 99.22,18.85
  Bottom 0.406: C14.2 LS13.E 99.44,15.86 100.13,16.55 100.13,18.32 99.6,18.85 99.22,18.85 98.84,18.85 98.41,18.42 RS14.2
LS14  (via drill 0.51)
  Top 0.254: U1.5 8.3,43.47
  Top 0.305: v89.06,12.5 83.57,12.5 82.91,11.84 80.37,11.84 79.28,10.75 54.31,10.75 53.29,11.77 49.47,11.77 48.13,13.11 45.67,13.11 44.28,14.51 43.13,14.51 40.63,14.51 36.95,18.19 33.58,18.19 8.3,43.47
  Bottom 0.406: C15.2 LS14.E 88.96,8.93 91.24,11.21 91.24,11.97 90.71,12.5 v89.06,12.5 87.89,12.5 RS15.2
LS15  (via drill 0.51)
  Top 0.254: U1.4 7.8,43.16
  Top 0.305: v78.03,8.69 76.48,10.24 54.1,10.24 53.08,11.27 49.26,11.27 47.92,12.6 45.46,12.6 44.07,14 42.92,14 40.42,14 36.74,17.68 33.28,17.68 7.8,43.16
  Bottom 0.406: C16.2 LS15.E 79.18,6.86 79.28,6.86 79.81,7.4 79.81,8.16 79.28,8.69 v78.03,8.69 77.04,9.68 RS16.2
LS16  (via drill 0.51)
  Top 0.254: U1.3 7.3,42.86
  Top 0.305: v67.47,7.73 65.46,9.73 53.89,9.73 52.87,10.76 49.05,10.76 47.71,12.1 45.25,12.1 43.86,13.49 40.21,13.49 36.53,17.18 32.98,17.18 7.3,42.86
  Bottom 0.305: v67.47,7.73 67.47,7.42
  Bottom 0.406: C17.2 LS16.E 67.34,5.59 67.85,5.59 68.38,6.13 68.38,6.89 67.85,7.42 67.47,7.42 66.78,7.42 RS17.2
LS17  (via drill 0.51)
  Top 0.254: U1.2 6.8,46.42 7.27,46.89
  Top 0.305: 7.27,46.89 7.52,47.15 v8.59,47.15 | v39.53,12.35 44.28,12.35 45.04,11.59 47.5,11.59 48.84,10.25 50.2,10.25 51.72,8.73 v51.72,8.67
  Bottom 0.305: v8.59,47.15 8.72,47.15 9.45,47.88 12.45,47.88 14.61,45.73 14.61,45.01 14.29,44.7 14.29,44.3 20.48,38.11 20.48,37.41 23.78,34.11 23.78,32.97 39.53,17.22 v39.53,12.35 | 54.74,9.1 54.31,8.67 53.53,8.67 53.53,8.66 53.52,8.67 v51.72,8.67
  Bottom 0.406: C18.2 LS17.E 54.4,5.59 56.42,5.59 56.95,6.13 56.95,6.89 54.74,9.1 RS18.2
LS18  (via drill 0.51)
  Top 0.254: U1.1 6.3,46.81 6.51,47.02
  Top 0.305: 6.51,47.02 7.14,47.66 7.52,47.66 8.23,48.37 v8.71,48.37
  Bottom 0.305: v8.71,48.37 9.22,48.37 9.24,48.39 12.66,48.39 15.32,45.74 15.32,43.99 20.99,38.32 20.99,37.62 24.29,34.32 24.29,33.18 44.09,13.37 RS19.2
  Bottom 0.406: C19.2 LS18.E 44.08,8.28 44.23,8.13 44.99,8.13 45.52,8.67 45.52,9.43 44.09,10.86 RS19.2
LS19  (via drill 0.51)
  Top 0.254: U1.45 3.71,48.44 v3.48,48.66
  Top 0.305: v6.85,38.22 6.97,38.22 7.37,37.82 7.87,37.82 9.55,36.14 9.55,33.06 22.93,19.69 22.93,19.57 29.63,12.87 v33.19,12.87
  Bottom 0.305: v3.48,48.66 3.97,48.18 3.97,44.84 6.39,39.64 6.45,39.5 6.45,38.61 v6.84,38.22 v6.85,38.22 | v33.19,12.87 33.73,12.87 34.07,13.21
  Bottom 0.406: C20.2 LS19.E 33.49,13.79 34.07,13.21 34.83,13.21 35.36,13.75 35.36,14.51 34.24,15.62 RS20.2
LS20  (via drill 0.51)
  Top 0.254: U1.46 4.9,47.91 3.91,47.91 3.41,47.4 3.41,46.16 4.09,45.47
  Top 0.305: v23.79,19.93 23.4,19.93 10.06,33.27 10.06,36.36 8.05,38.37 8.05,39.64 4.73,42.95 4.73,43.68 4.09,44.31 4.09,45.47
  Bottom 0.406: C21.2 v23.79,19.93 LS20.E 24.75,21.26 25.18,20.83 25.94,20.83 26.47,21.37 26.47,22.13 25.58,23.02 RS21.2
LS21  (via drill 0.51)
  Top 0.254: U1.47 4.9,47.41 4.06,47.41 3.87,47.21 3.87,46.48 4.63,45.71
  Top 0.305: 4.63,45.71 4.63,44.5 5.24,43.89 5.24,43.16 8.55,39.85 8.55,38.58 10.57,36.57 10.57,33.48 15.5,28.55 v16.01,28.55
  Bottom 0.406: C22.2 v16.01,28.55 LS21.E 15.86,30.41 16.55,29.72 18.32,29.72 18.85,30.26 18.85,31.02 18.42,31.45 RS22.2
LS22  (via drill 0.51)
  Top 0.254: U1.48 4.93,46.18 5.24,45.88
  Top 0.305: 5.24,45.88 5.24,44.61 5.75,44.1 5.75,43.38 9.06,40.06 9.06,38.79 9.32,38.53 v9.97,38.53
  Bottom 0.406: C23.2 v9.97,38.53 9.65,39.21 9.42,39.7 LS22.E 8.93,40.89 11.21,38.61 11.97,38.61 12.5,39.15 12.5,41.97 RS23.2
LS23  (via drill 0.51)
  Top 0.254: U1.40 7.57,50.94
  Top 0.305: 7.57,50.94 v8.17,51.54
  Bottom 0.305: v8.17,51.54 8.16,51.55
  Bottom 0.406: C24.2 LS23.E 5.87,52.29 6.61,51.55 8.16,51.55 RS24.2
LS24  (via drill 0.51)
  Top 0.254: U1.37 5.24,52.74 5.24,53.5
  Top 0.305: 5.24,53.5 v5.24,61.17
  Bottom 0.305: v5.24,61.17 4.01,62.39
  Bottom 0.406: C25.2 4.01,62.39 LS24.E 5.59,62.51 5.59,62.01 6.13,61.47 6.89,61.47 7.42,62.01 7.42,63.07 RS25.2
LS25  (via drill 0.51)
  Top 0.254: U1.38 4.9,51.97 4.06,51.97 3.87,52.16 3.87,52.71 3.97,52.82 3.97,53.5
  Top 0.305: 3.97,53.5 3.97,53.55 3.1,54.41 3.1,62.7 3.97,63.57 3.97,73.25 v4.63,73.91
  Bottom 0.406: C26.2 v4.63,73.91 LS25.E 5.5,76.09 5.59,76 5.59,73.44 6.13,72.9 6.89,72.9 7.42,73.44 7.42,73.46 7.78,73.82 8.05,73.82 RS26.2
LS26  (via drill 0.51)
  Top 0.254: U1.39 4.9,51.47 3.91,51.47 3.41,51.97 3.41,53.3
  Top 0.305: v7.48,85.35 7.48,81.14 6.51,80.17 6.51,77.01 3.46,73.96 3.46,63.78 2.6,62.91 2.6,54.11 3.41,53.3
  Bottom 0.406: C27.2 v7.48,85.35 LS26.E 8.95,86.91 8.95,85.32 9.94,84.33 10.7,84.33 12.13,85.76 RS27.2
LS27  (via drill 0.51)
  Top 0.254: U1.36 6.33,53.83 6.33,60.56 8.69,62.92
  Top 0.305: v12.31,96.55 11.5,95.74 11.5,94.22 10.83,93.54 10.83,91.51 8.44,89.12 8.44,84.47 8.54,84.37 8.54,67.69 8.69,67.54 8.69,62.92
  Bottom 0.305: v12.31,96.55 12.37,96.55 12.64,96.28
  Bottom 0.406: C28.2 12.64,96.28 LS27.E 14.23,97.75 14.23,95.28 15.02,94.49 15.78,94.49 16.89,95.61 RS28.2
LS28  (via drill 0.51)
  Top 0.254: U1.35 6.8,60.25 9.3,62.76
  Top 0.305: 9.3,62.76 9.3,63.66 9.3,63.91 9.3,67.65 9.05,67.9 9.05,84.58 8.95,84.68 8.95,88.91 11.33,91.3 11.33,93.33 12.1,94.09 12.1,95.11 14.76,97.78 14.76,99.43 18.19,102.86 18.19,103.87 19.21,104.89 v19.21,106.84
  Bottom 0.305: v19.21,106.84 19.93,106.11 19.93,106.06
  Bottom 0.406: C29.2 19.93,106.06 LS28.E 21.26,105.11 20.83,104.68 20.83,103.92 21.37,103.38 22.13,103.38 23.02,104.28 RS29.2
LS29  (via drill 0.51)
  Top 0.254: U1.34 7.3,59.98 9.91,62.59
  Top 0.305: v29.72,113.19 28.22,113.19 18.7,103.66 18.7,102.65 15.27,99.22 15.27,97.57 12.6,94.9 12.6,93.88 11.84,93.12 11.84,91.09 9.45,88.7 9.45,84.89 9.56,84.79 9.56,68.11 9.91,67.76 9.91,62.59
  Bottom 0.406: C30.2 LS29.E 30.41,113.99 29.72,113.3 v29.72,113.19 29.72,111.54 30.26,111 31.02,111 31.45,111.43 RS30.2
LS30  (via drill 0.51)
  Top 0.254: U1.33 7.8,59.71 10.52,62.43
  Top 0.305: v39.53,116.24 38.61,116.24 36.99,114.61 36.09,114.61 34.82,113.34 33.55,113.34 27.2,106.99 25.93,106.99 21.6,102.65 21.6,101.38 17.79,97.57 17.79,96.3 15.25,93.76 15.25,92.49 13.98,91.22 13.98,89.95 11.44,87.41 11.44,84.87 10.06,83.5 10.06,68.32 10.52,67.87 10.52,62.43
  Bottom 0.305: v39.53,116.24 39.53,117.35
  Bottom 0.406: C31.2 LS30.E 40.89,120.92 38.61,118.65 38.61,117.89 39.15,117.35 39.53,117.35 41.97,117.35 RS31.2
LS31  (via drill 0.51)
  Top 0.254: U1.32 8.3,59.43 11.13,62.27
  Top 0.305: v49.08,119.54 48.72,119.18 47.73,119.18 46.46,117.91 43.92,117.91 42.65,116.64 41.38,116.64 40.11,115.37 38.84,115.37 37.57,114.1 36.3,114.1 35.03,112.83 33.76,112.83 27.41,106.48 26.14,106.48 22.1,102.44 22.1,101.17 18.29,97.36 18.29,96.09 15.75,93.55 15.75,92.28 14.48,91.01 14.48,89.74 11.94,87.2 11.94,84.66 10.57,83.29 10.57,68.53 11.13,67.98 11.13,62.27
  Bottom 0.305: v49.08,119.54 50.58,121.04 50.58,121.16
  Bottom 0.406: C32.2 LS31.E 50.67,122.99 50.58,122.99 50.04,122.46 50.04,121.7 50.58,121.16 52.08,121.16 RS32.2
N$1
  Bottom 0.406: LED0.A 65.68,127.22 66.48,126.42 66.48,125.28 65.78,124.57 RL1.1
N$2
  Bottom 0.406: LED1.A 77.95,125.61 78.47,125.1 78.47,124.12 77.27,122.92 RL2.1
N$3
  Bottom 0.406: LED2.A 89.73,121.59 89.93,121.4 89.93,120.6 89.36,120.03 89.21,120.03 RL3.1
N$4
  Bottom 0.406: LED3.A 100.43,116.77 100.43,114.94 99.73,114.24 99.15,114.24 RL4.1
N$5
  Bottom 0.406: LED4.A 109.56,108.5 109.56,107.36 108.76,106.56 107.76,106.56 RL5.1
N$6
  Bottom 0.406: LED5.A 117.05,98.63 117.05,97.91 116.35,97.21 114.67,97.21 RL6.1
N$7
  Bottom 0.406: LED6.A 122.53,87.46 122.53,87.18 121.97,86.62 121.17,86.62 121.07,86.72 RL7.1
N$8
  Bottom 0.406: LED7.A 126.69,76.48 125.39,75.19 124.41,75.19 124,75.6 RL8.1
N$9
  Bottom 0.406: LED8.A 127.3,64.18 126.5,63.37 125.36,63.37 124.65,64.08 RL9.1
N$10
  Bottom 0.406: LED9.A 125.61,51.9 125.1,51.39 124.12,51.39 122.92,52.58 RL10.1
N$11
  Bottom 0.406: LED10.A 121.59,40.13 121.4,39.93 120.6,39.93 120.03,40.49 120.03,40.64 RL11.1
N$12
  Bottom 0.406: LED11.A 116.77,29.43 114.94,29.43 114.24,30.12 114.24,30.71 RL12.1
N$13
  Bottom 0.406: LED12.A 108.5,20.29 107.36,20.29 106.56,21.1 106.56,22.09 RL13.1
N$14
  Bottom 0.406: LED13.A 98.63,12.8 97.91,12.8 97.21,13.5 97.21,15.19 RL14.1
N$15
  Bottom 0.406: LED14.A 87.46,7.32 87.18,7.32 86.62,7.89 86.62,8.68 86.72,8.79 RL15.1
N$16
  Bottom 0.406: LED15.A 76.48,3.17 75.19,4.46 75.19,5.45 75.6,5.86 RL16.1
N$17
  Bottom 0.406: LED16.A 64.18,2.55 63.37,3.36 63.37,4.5 64.08,5.2 RL17.1
N$18
  Bottom 0.406: LED17.A 51.9,4.24 51.39,4.75 51.39,5.74 52.58,6.93 RL18.1
N$19
  Bottom 0.406: LED18.A 40.13,8.26 39.93,8.46 39.93,9.26 40.49,9.82 40.64,9.82 RL19.1
N$20
  Bottom 0.406: LED19.A 29.43,13.09 29.43,14.91 30.12,15.61 30.71,15.61 RL20.1
N$21
  Bottom 0.406: LED20.A 20.29,21.35 20.29,22.49 21.1,23.3 22.09,23.3 RL21.1
N$22
  Bottom 0.406: LED21.A 12.8,31.23 12.8,31.95 13.5,32.65 15.19,32.65 RL22.1
N$23
  Bottom 0.406: LED22.A 7.32,42.4 7.32,42.68 7.89,43.24 8.68,43.24 8.79,43.13 RL23.1
N$24
  Bottom 0.406: RL24.1 5.86,54.25 4.43,55.68 3.59,55.68 3.05,55.15 3.05,53.43 LED23.A
N$25
  Bottom 0.406: LED24.A 2.55,65.68 3.36,66.48 4.5,66.48 5.2,65.78 RL25.1
N$26
  Bottom 0.406: LED25.A 4.24,77.95 4.75,78.47 5.74,78.47 6.93,77.27 RL26.1
N$27
  Bottom 0.406: LED26.A 8.26,89.73 8.46,89.93 9.26,89.93 9.82,89.36 9.82,89.21 RL27.1
N$28
  Bottom 0.406: LED27.A 13.09,100.43 14.91,100.43 15.61,99.73 15.61,99.15 RL28.1
N$29
  Bottom 0.406: LED28.A 21.35,109.56 22.49,109.56 23.3,108.76 23.3,107.76 RL29.1
N$30
  Bottom 0.406: LED29.A 31.23,117.05 31.95,117.05 32.65,116.35 32.65,114.67 RL30.1
N$31
  Bottom 0.406: LED30.A 42.4,122.53 42.68,122.53 43.24,121.97 43.24,121.17 43.13,121.07 RL31.1
N$32
  Bottom 0.406: LED31.A 53.37,126.69 54.66,125.39 54.66,124.41 54.25,124 RL32.1
N$33
  Top 1.905: Q1.2 82.45,78.77 R1.P$2
N$34
  Top 2.032: BOOSTER.P3 71.28,94.66
  Top 2.54: 71.28,95.41 71.28,94.66 71.28,92.87 70.89,92.87 70.89,94.9
  Top 3.81: D.A 73.82,94.14
  pour Top: 69.75,96.68 69.75,91.6 76.36,91.6 76.36,96.68
N$35
  Top 5.08: R4.2 D.C
OUT
  Top 1.016: SOLENOID.P3 60.84,44.99 | 60.84,44.99 59.21,44.99 | 59.59,45.75 59.72,45.88 62.26,45.88 63.15,44.99 60.84,44.99 | RELAY1.C 61.12,61.88 | 61.12,61.88 61.12,62.13 | 61.12,61.88 61.12,60.48 60.99,60.36 59.97,60.36 59.59,60.74 59.59,61.88 59.85,62.13 | K1.S 61.75,70.26 61.75,71.79 62.39,71.15 62.39,68.1 62.13,67.85 61.75,68.23 61.75,69.37 60.74,68.36 60.74,68.1 | 60.74,67.85 60.74,68.1 | 60.74,68.1 60.1,68.74 60.61,69.25 60.61,72.04
  pour Top: 58.58,73.82 59.85,75.09 62.39,75.09 63.66,73.82 63.66,57.31 64.93,56.04 64.93,50.96 63.66,49.69 63.66,44.61 58.58,44.61
OUTPUT  (via drill 0.51)
  Top 0.254: U1.43 6.93,49.44 v7.02,49.36
  Top 0.406: v19.21,63.66 24.21,68.66 29.93,68.66 31.91,70.64 B1.20
  Bottom 0.406: v19.21,63.66 14.13,58.58 14.13,57.31 15.4,56.04 15.4,50.96 13.8,49.36 10.75,49.36 10.42,49.69 7.35,49.69 v7.02,49.36
RELAY
  Top 0.508: 70.64,88.8 71.28,89.44 71.79,89.44 72.17,89.06 72.17,88.17 71.53,87.53 70.52,87.53 70.13,87.91 70.13,88.93 70.9,89.69 71.4,89.69 71.4,88.68 RELAY.A 71.02,88.8 70.64,88.8 | 70.64,88.8 70.52,88.68 70.52,88.04 70.64,87.91 70.77,88.04 71.53,88.04 71.79,88.3 71.79,89.18 70.9,88.3 70.64,88.3 70.64,88.8
  Top 1.27: 73.69,84.1 73.69,82.45 K1.2 74.45,83.22 | 74.45,83.22 74.45,83.98 | 74.45,83.22 74.45,81.06 73.69,80.29 73.44,80.55 72.29,80.55 72.29,83.34 72.8,83.85 | 72.8,83.85 72.8,83.98 | 72.8,83.85 72.8,81.31 73.06,81.56 73.82,81.56
  Top 1.905: DISCHARGE.3 80.83,73.21 81.44,73.82 80.17,73.82 80.17,72.55 81.44,72.55 | DISCHARGE.4 81.13,66.2 | 81.13,66.2 81.44,66.2 | 81.13,66.2 80.17,66.2 80.17,67.47 81.44,67.47 | Q1.1 84.61,84.1 84.56,84.16 | 84.36,84.36 84.56,84.16 | 84.56,84.16 84.56,82.33 85.07,82.83 85.12,82.83
  pour Top: 71.28,86.52 70.01,87.79 70.01,89.06 71.28,90.33 72.55,90.33 73.82,89.06 73.82,87.79 75.09,86.52 82.71,86.52 83.98,85.25 85.25,85.25 86.52,83.98 86.52,82.71 85.25,81.44 83.98,81.44 82.71,80.17 82.71,66.2 81.44,64.93 71.28,64.93
SCL  (via drill 0.51)
  Top 0.406: v34.19,75.34 33.18,76.36 16.67,76.36 15.4,77.63 15.4,81.44 16.67,82.71 16.67,85.25 19.21,87.79 19.21,89.06 20.48,90.33 20.48,91.6 23.02,94.14 23.02,95.41 26.83,99.22 26.83,100.49 28.1,101.76 29.37,101.76 35.72,108.11 36.99,108.11 38.26,109.38 39.53,109.38 40.8,110.65 42.07,110.65 43.34,111.92 44.61,111.92 45.88,113.19 48.42,113.19 49.69,114.46 53.5,114.46 54.77,115.73 67.09,115.73 67.44,116.08 U$1.3
  Bottom 0.406: B1.19 34.45,75.09 v34.19,75.34
SDA  (via drill 0.51)
  Top 0.406: B1.18 36.99,73.82 36.38,74.43 33.81,74.43 32.49,75.75 16.41,75.75 14.79,77.37 14.79,81.69 16.06,82.96 16.06,85.5 18.6,88.04 18.6,89.31 19.87,90.58 19.87,91.85 22.41,94.39 22.41,95.66 26.22,99.47 26.22,100.74 27.84,102.37 29.11,102.37 35.46,108.72 36.73,108.72 38,109.99 39.27,109.99 40.54,111.26 41.81,111.26 43.08,112.53 44.35,112.53 45.62,113.8 48.16,113.8 49.43,115.07 53.24,115.07 54.77,116.59 v54.77,116.64 | v64.93,118.98 65.99,118.98 66.43,118.54 U$1.4
  Bottom 0.406: v54.77,116.64 55.12,116.64 56.04,115.73 64.93,115.73 66.2,117 66.2,117.71 v64.93,118.98
SIGNAL
  Top 0.508: R1.P$1 R2.P$2 77.75,66.43 SIGNAL.P3
VCC
  Top 3.175: R4.1 76.36,78.9 73.31,75.85 K1.O

## Text on the board
tPlace: BRISBANE BOYS' COLLEGE ROBOTICS / LightWeight